# Altium PCB PCB1.pcbdoc
Units mm, origin at the board's own origin, x right, y up, seen from the top; angles counter-clockwise.
Board outline 21.25 x 18.1 mm, 2 copper layers (Top Layer, Bottom Layer); 1 components, 0 nets, 6 pads, 0 vias.
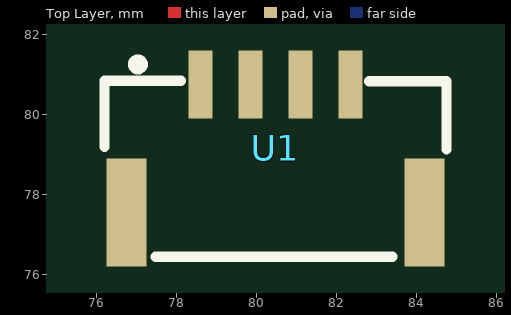
[diagram p0: Top Layer view]
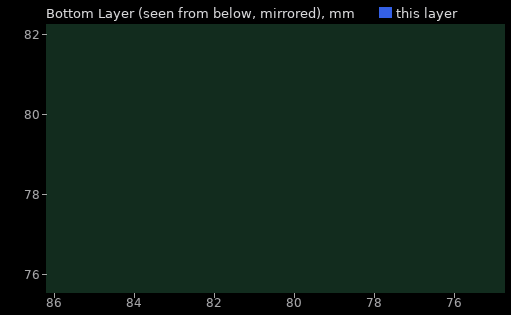
[diagram p1: Bottom Layer view, seen from below]

## Layer stack, top to bottom
Top Layer: signal copper (thickness not stored)
Dielectric: dielectric 0.32, FR-4, Dk 4.8
Bottom Layer: signal copper (thickness not stored)

## Board outline
91.1,69.85 69.85,69.85 69.85,87.949 91.1,87.949

## Components (designator, comment, footprint, x,y, rotation, side; value= is the part's Value field where it differs from the comment)
U1 "SM04B-GHS-TB(LF)(SN)" CONN-SMD_4P-P1.25_SM04B-GHS-TB-LF-SN 80.47,79.15 r0 top

## Footprints (in the part's own frame and the unit in brackets; to place one, negate y for a bottom-side part, rotate by r counter-clockwise, add the part's x,y. Pads: shape width x height; smd on the part's side, far side on the other; paste and mask are expansions set on the pad)
CONN-SMD_4P-P1.25_SM04B-GHS-TB-LF-SN [mm]
  rect 0.6x1.7 smd paste+0 mask+0.051: 1(-1.876,1.6) 2(-0.626,1.6) 3(0.625,1.6) 4(1.875,1.6)
  rect 1x2.7 smd paste+0 mask+0.051: 5(3.725,-1.6) 6(-3.725,-1.6)
  silkscreen extent -4.27,-2.71 4.28,2.22

## Nets (pads, with @x,y where several pads share a name; then routed paths per layer and width w, separated by ;. In a path a pad name is that pad's centre, name@x,y a point inside that pad or via, vN(x,y) a via of type N, cw(c..) or ccw(c..) an arc to the next point about the centre after c; other vN are vias at no path point)
pads on no net: U1.1 U1.2 U1.3 U1.4 U1.5 U1.6